# Altium PCB LNApcb.PcbDoc
Units mil, origin at the board's own origin, x right, y up, seen from the top; angles counter-clockwise.
Board outline 6000 x 4000 mil, 2 copper layers (Top Layer, Bottom Layer), stack 61.855 mil thick; 17 components, 7 nets, 42 pads, 4 vias.
Unrouted connection lines stored in the file: 16.
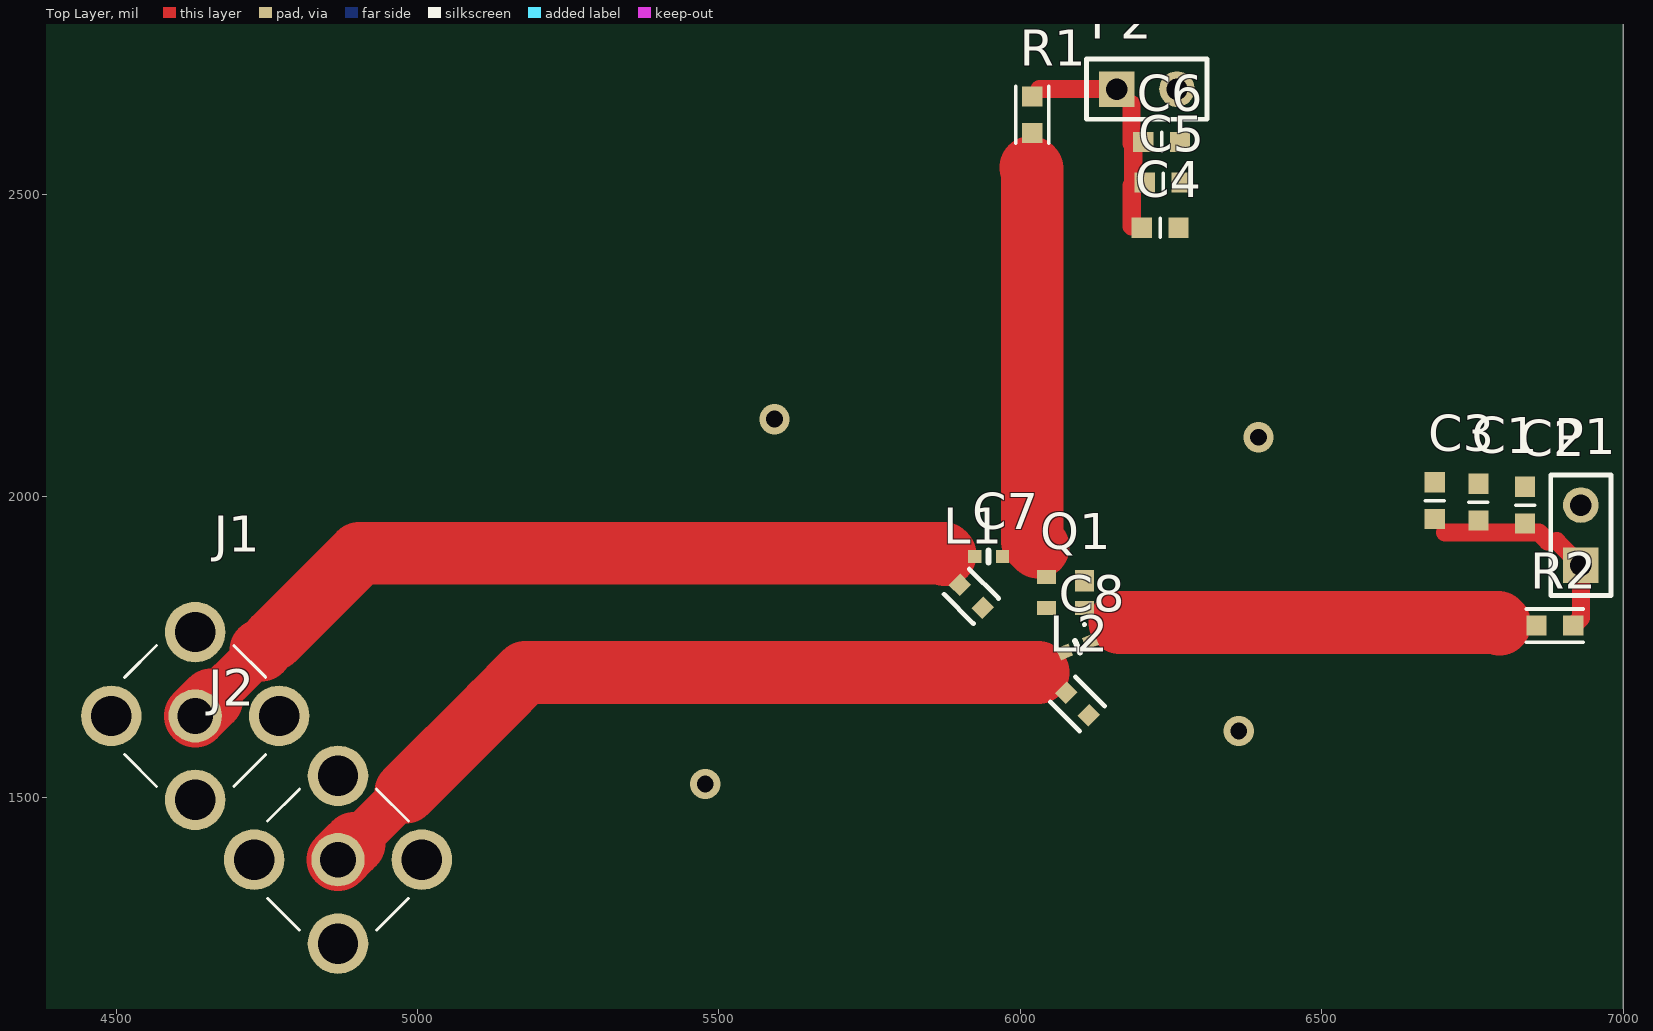
[diagram p0: Top Layer view]
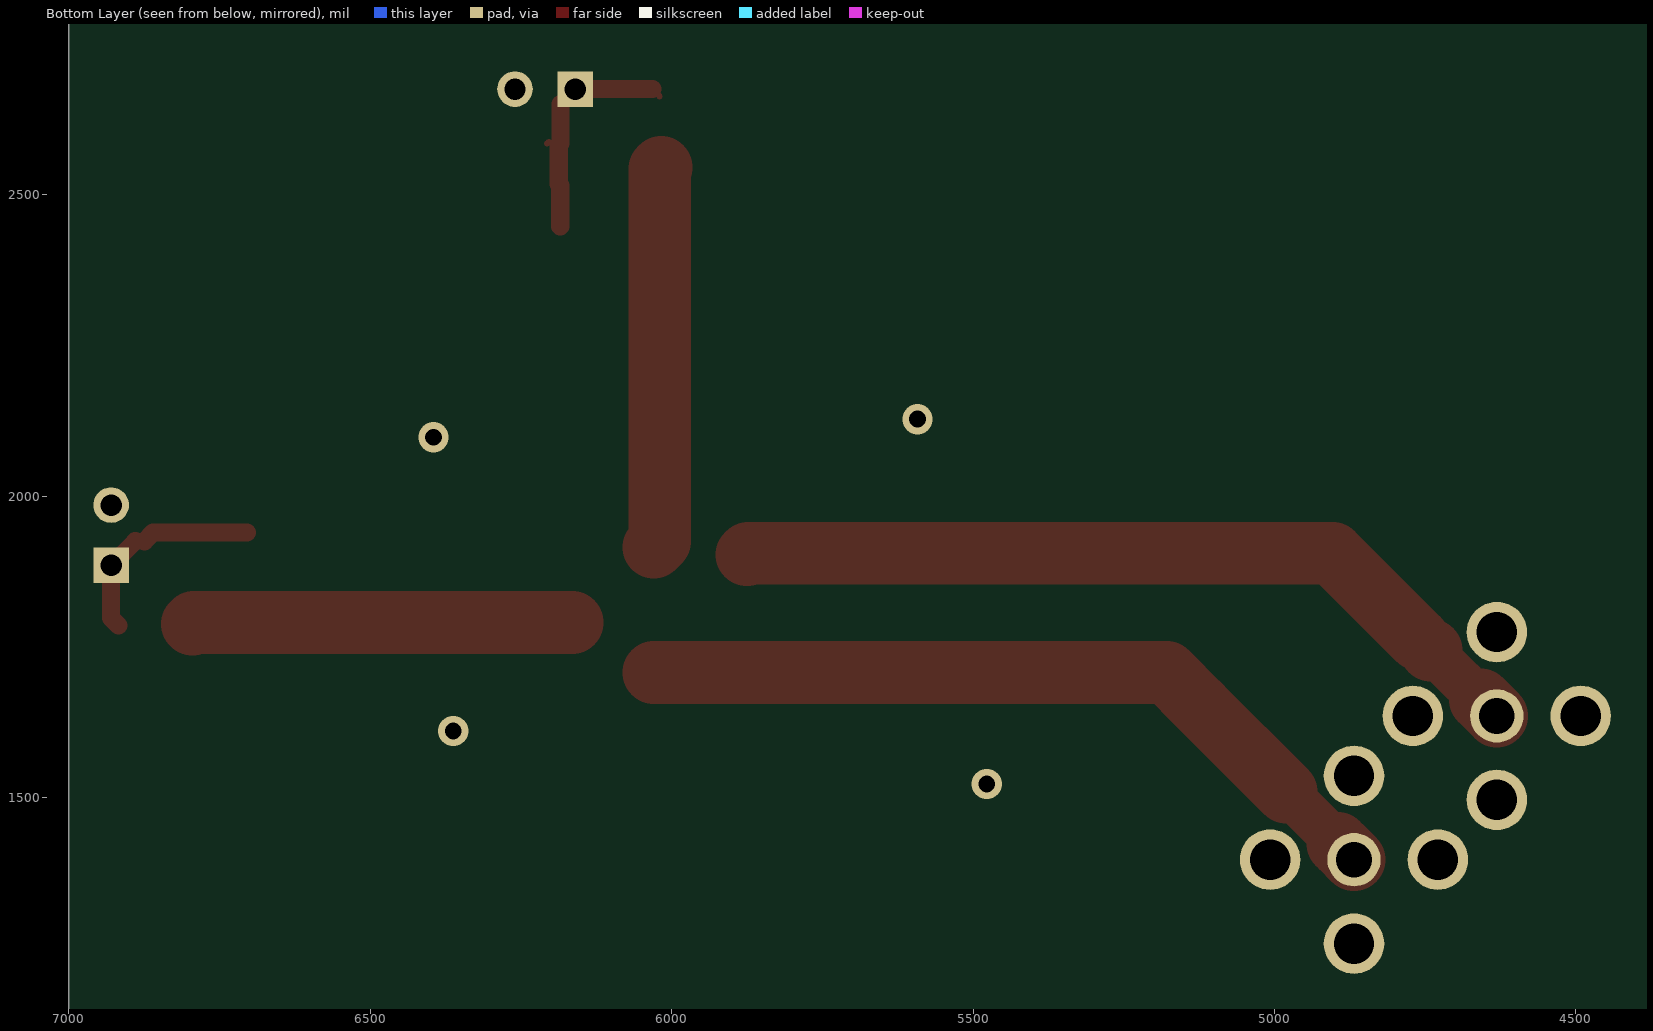
[diagram p1: Bottom Layer view, seen from below]
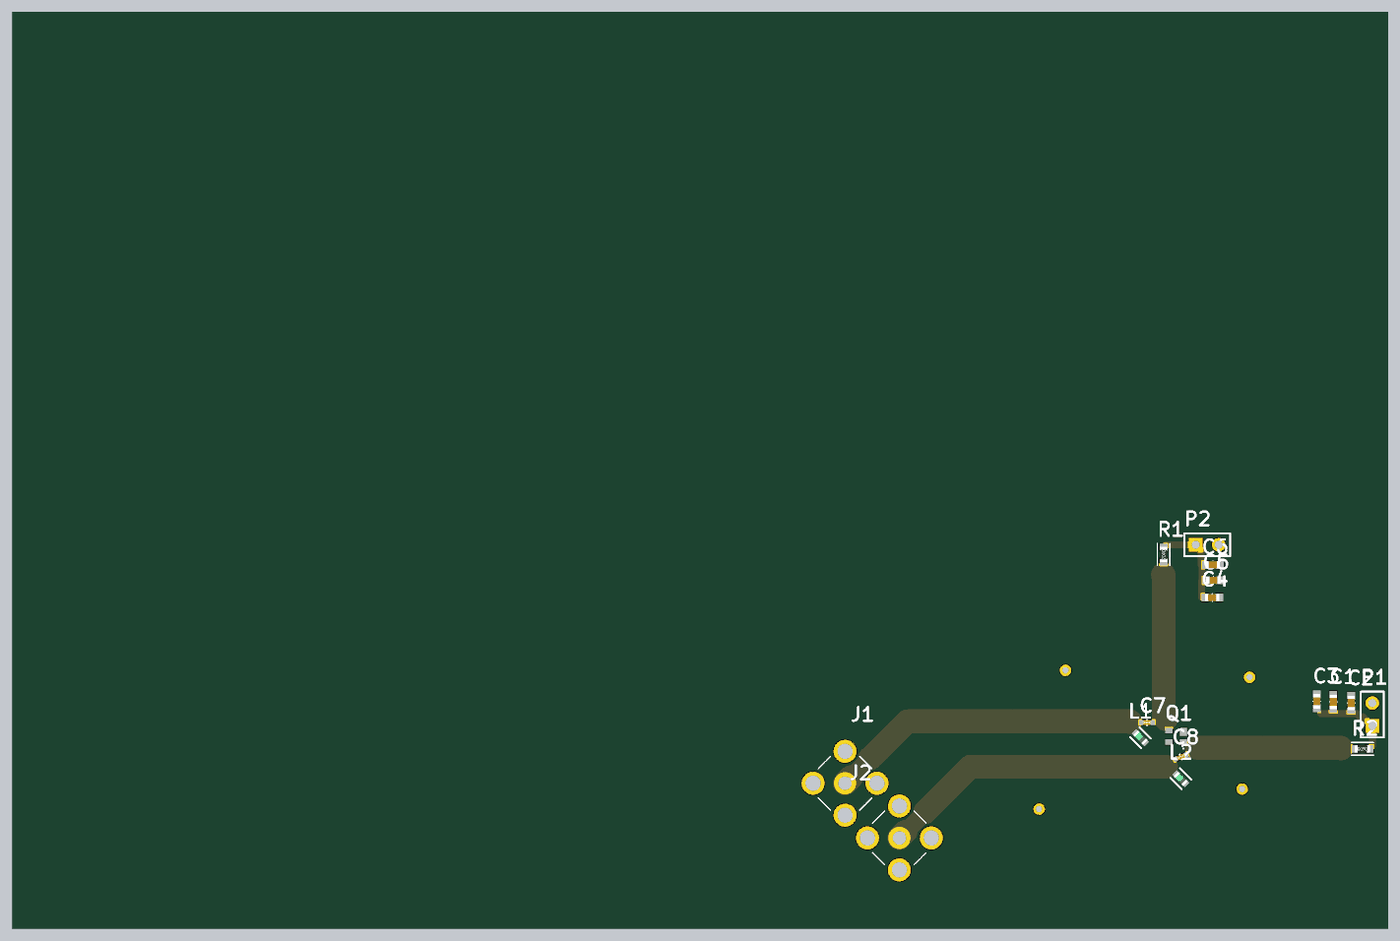
[diagram p2: 3D render of the assembled board from above, using the file's embedded part models]

## Layer stack, top to bottom
Top Layer: signal copper 1.4
Dielectric 1: dielectric 59.0551, FR-4, Dk 4.9
Bottom Layer: signal copper 1.4

## Board outline
1000,1000 7000,1000 7000,5000 1000,5000

## Design rules (kind name [scope] priority, off if disabled: settings)
Clearance [All] p1: gap=10 ignorepadtopadclearanceinfootprint=FALSE except(0: Arc-Hole Track-Hole SMDPad-Hole THPad-Hole Via-Hole Fill-Hole Poly-Hole Region-Hole Text-Hole)
HoleSize [All] p1: absolutevalues=TRUE maxlimit=118.11 minlimit=27.56 maxpercent=80.000 minpercent=20.000
Length "Schematic Length Constraint_3" [InNet('NetC7_2')] p1: maxlimit=1287.4 minlimit=1244.09
Length "Schematic Length Constraint_2" [InNet('NetC8_1')] p2: maxlimit=1287.4 minlimit=1244.09
Length "Schematic Length Constraint_1" [InNet('NetC7_1')] p3: maxlimit=645.67 minlimit=622.05
Length "Schematic Length Constraint" [InNet('NetC8_2')] p4: maxlimit=645.67 minlimit=622.05
MinimumSolderMaskSliver [All] p1: minsoldermaskwidth=4.92
PlaneConnect [All] p1: planeconnectstyle=Relief reliefexpansion=20 reliefentries=4 reliefconductorwidth=12 reliefairgap=10
PolygonConnect [All] p1: connectstyle=Relief reliefconductorwidth=19.68 reliefentries=4 polygonreliefangle="90 Angle" airgapwidth=7.87
RoutingVias [All] p1: holewidth=27.56 width=62.99 viastyle="Through Hole" minholewidth=27.56 minwidth=62.99 maxholewidth=27.56 maxwidth=62.99
SilkToSilkClearance [All] p1: silktosilkclearance=4.72
SilkToSolderMaskClearance [IsPad] p1: minsilkscreentomaskgap=3.94 clearancetoexposedcopper=TRUE
SolderMaskExpansion [All] p1: expansion=4 istentingtop=FALSE
Width RF-rule [InNetClass('RF')] p1: maxlimit=104.2 minlimit=104.2 preferedwidth=104.2 impedanceprofiledriven=TRUE impedanceprofileid={E7A6EAA5-AD94-4B6C-8492-8AB82108E587} impedanceprofilevalue=50.000000 minimp=50.000000 maximp=50.000000 favimp=50.000000 // impedanceForTheRF
Width Width_1 [All] p2: maxlimit=10 minlimit=10 preferedwidth=10
25 further rules are at their usual default settings.

## Classes and differential pairs
net class RF: NetC7_1 NetC7_2 NetC8_1 NetC8_2

## Components (designator, comment, footprint, x,y, rotation, side; value= is the part's Value field where it differs from the comment)
C1 "10µF" SMD-0603C 6760,1990 r0 top
C2 "0.10µF" SMD-0603C 6837.5,1985 r0 top
C3 "100pF" SMD-0603C 6687.5,1992.5 r0 top
C4 "0.10µF" SMD-0603C 6231.99,2445 r90 top
C5 "100pF" SMD-0603C 6236.99,2520 r90 top
C6 "10µF" SMD-0603C 6234.49,2587.5 r90 top
C7 "3pF" SMD-0402C 5947.5,1900 r270 top
C8 "10pF" SMD-0402C 6095,1750 r112.5 top
J1 "Output" LPRS_SMACONNECTOR 4631.29,1635.19 r315 top
J2 "Input" LPRS_SMACONNECTOR 4868.21,1396.75 r225 top
L1 "3.3nH" FP-LQG18HH_00-MFG 5918.79,1833.71 r135 top
L2 "1.8nH" FP-LQG18HH_00-MFG 6095,1655 r135 top
P1 "Header 2" HDR1X2 6930,1885 r90 top
P2 "Header 2" HDR1X2 6160,2675 r0 top
Q1 "BFP450" INF-SOT343_V 6075,1840 r180 top
R1 "40.2" SMD-0603-RES 6020,2632.5 r180 top
R2 "11k" SMD-0603-RES 6886.99,1785 r90 top

## Footprints (in the part's own frame and the unit in brackets; to place one, negate y for a bottom-side part, rotate by r counter-clockwise, add the part's x,y. Pads: shape width x height; smd on the part's side, far side on the other; paste and mask are expansions set on the pad)
FP-LQG18HH_00-MFG [mm]
  rect 0.65x0.7 smd paste+0 mask+0: 1(-0.675,0) 2(0.675,0)
  silkscreen extent -0.88,-0.75 0.88,0.75, body extent -1.1,-0.57 1.1,0.58, height 0.25
HDR1X2 [mm] "Connector; Header; 2 Position"
  rect 1.5x1.5 hole 0.9: 1(0,0)
  round 1.5 hole 0.9: 2(2.54,0)
  silkscreen extent -1.27,-1.27 3.81,1.27
INF-SOT343_V [mm] "SOT343, 4-Leads, Body 2x1.25 mm"
  rect 0.8x0.6 smd: 1(-0.8,0.65) 3(0.8,-0.65) 4(0.8,0.65)
  rect 0.8x0.9 smd: 2(-0.8,-0.5)
  silkscreen extent -0.85,1.3 -0.75,1.4, body extent -0.63,-1 0.63,1, height 1
LPRS_SMACONNECTOR [mm]
  round 2.25 hole 1.5: 1(0,0)
  round 2.55 hole 1.7: 2(2.5,2.5) 3(2.5,-2.5) 4(-2.5,-2.5) 5(-2.5,2.5)
  silkscreen extent -3.25,-3.25 3.25,3.25
SMD-0402C [mm]
  rect 0.55x0.55 smd: 1(0,0.584) 2(0,-0.584)
  silkscreen extent -0.25,0 0.25,0, body extent -0.25,-0.51 0.25,0.51, height 0.51
SMD-0603-RES [mm]
  rect 0.85x0.85 smd: 1(0,0.775) 2(0,-0.775)
  silkscreen extent -0.7,-1.2 0.7,1.2, body extent -0.4,-0.85 0.4,0.85, height 0.56
SMD-0603C [mm]
  rect 0.85x0.85 smd: 1(0,0.775) 2(0,-0.775)
  silkscreen extent -0.4,0 0.4,0, body extent -0.4,-0.8 0.4,0.8, height 0.9

## Part data
C1 C6: library part GRM185R60J106ME15D, "CAP CER 10UF 6.3V X5R 0603", Digi-Key Part Number=490-10467-1-ND, Manufacturer="Murata Electronics North America", Operating Temperature="-55°C ~ 85°C", Package / Case="0603 (1608 Metric)", Ratings=-, Temperature Coefficient=X5R, Tolerance=±20%, Voltage=6.3V, @ qty=0, Applications="General Purpose", Datasheets=http://www.murata.com/~/media/webrenewal/support/library/catalog/products/capacitor/mlcc/c02e.pdf, Factory Stock=0, Features="Derating Recommended", Height - Seated (Max)=-, Image=//media.digikey.com/Renders/Murata%20Renders/ZRB-SERIES-0402.jpg, Lead Spacing=-, Lead Style=-, Minimum Quantity=1, Mounting Type="Surface Mount, MLCC", Packaging="Cut Tape (CT)", Part Number=GRM185R60J106ME15D, Part Status=Active, Quantity Available=25068, Series=GRM, Size / Dimension="0.063\" L x 0.031\" W (1.60mm x 0.80mm)", Thickness (Max)="0.022\" (0.55mm)", Unit Price (USD)=0.36
C2 C4: library part GCJ188R71C104KA01D, "CAP CER 0.1UF 16V X7R 0603", Digi-Key Part Number=490-5796-1-ND, Manufacturer="Murata Electronics North America", Operating Temperature="-55°C ~ 125°C", Package / Case="0603 (1608 Metric)", Ratings=AEC-Q200, Temperature Coefficient=X7R, Tolerance=±10%, Voltage=16V, @ qty=0, Applications="Automotive, Boardflex Sensitive", Datasheets=http://www.murata.com/~/media/webrenewal/support/library/catalog/products/capacitor/mlcc/c03e.ashx, Factory Stock=0, Features="Soft Termination", Height - Seated (Max)=-, Image=//media.digikey.com/Renders/Murata%20Renders/0603%28LQG18%29.jpg, Lead Spacing=-, Lead Style=-, Minimum Quantity=1, Mounting Type="Surface Mount, MLCC", Packaging="Cut Tape (CT)", Part Number=GCJ188R71C104KA01D, Part Status=Active, Quantity Available=22473, Series=GCJ, Size / Dimension="0.063\" L x 0.031\" W (1.60mm x 0.80mm)", Thickness (Max)="0.035\" (0.90mm)", Unit Price (USD)=0.21
C3 C5: library part GCM1885C1H101JA16D, "CAP CER 100PF 50V NP0 0603", Digi-Key Part Number=490-4767-1-ND, Manufacturer="Murata Electronics North America", Operating Temperature="-55°C ~ 125°C", Package / Case="0603 (1608 Metric)", Ratings=AEC-Q200, Temperature Coefficient="C0G, NP0", Tolerance=±5%, Voltage=50V, @ qty=0, Applications=Automotive, Datasheets=http://www.murata.com/~/media/webrenewal/support/library/catalog/products/capacitor/mlcc/c03e.ashx, Factory Stock=0, Features=-, Height - Seated (Max)=-, Image=//media.digikey.com/Renders/Murata%20Renders/0603%28GCM188%29.jpg, Lead Spacing=-, Lead Style=-, Minimum Quantity=1, Mounting Type="Surface Mount, MLCC", Packaging="Cut Tape (CT)", Part Number=GCM1885C1H101JA16D, Part Status=Active, Quantity Available=85695, Series=GCM, Size / Dimension="0.063\" L x 0.031\" W (1.60mm x 0.80mm)", Thickness (Max)="0.035\" (0.90mm)", Unit Price (USD)=0.1
C7: library part GCM1555C1H3R0CA16D, "CAP CER 3PF 50V NP0 0402", Digi-Key Part Number=490-13290-1-ND, Manufacturer="Murata Electronics North America", Operating Temperature="-55°C ~ 125°C", Package / Case="0402 (1005 Metric)", Ratings=AEC-Q200, Temperature Coefficient="C0G, NP0", Tolerance=±0.25pF, Voltage=50V, @ qty=0, Applications=Automotive, Datasheets=http://www.murata.com/~/media/webrenewal/support/library/catalog/products/capacitor/mlcc/c03e.ashx, Factory Stock=0, Features=-, Height - Seated (Max)=-, Image=//media.digikey.com/Renders/Murata%20Renders/ZRB-SERIES-0402.jpg, Lead Spacing=-, Lead Style=-, Minimum Quantity=1, Mounting Type="Surface Mount, MLCC", Packaging="Cut Tape (CT)", Part Number=GCM1555C1H3R0CA16D, Part Status=Active, Quantity Available=4400, Series=GCM, Size / Dimension="0.039\" L x 0.020\" W (1.00mm x 0.50mm)", Thickness (Max)="0.022\" (0.55mm)", Unit Price (USD)=0.1
C8: library part GCM1555C1H100JA16D, "CAP CER 10PF 50V NP0 0402", Digi-Key Part Number=490-10668-1-ND, Manufacturer="Murata Electronics North America", Operating Temperature="-55°C ~ 125°C", Package / Case="0402 (1005 Metric)", Ratings=AEC-Q200, Temperature Coefficient="C0G, NP0", Tolerance=±5%, Voltage=50V, @ qty=0, Applications=Automotive, Datasheets=http://www.murata.com/~/media/webrenewal/support/library/catalog/products/capacitor/mlcc/c03e.ashx, Factory Stock=0, Features=-, Height - Seated (Max)=-, Image=//media.digikey.com/Renders/Murata%20Renders/ZRB-SERIES-0402.jpg, Lead Spacing=-, Lead Style=-, Minimum Quantity=1, Mounting Type="Surface Mount, MLCC", Packaging="Cut Tape (CT)", Part Number=GCM1555C1H100JA16D, Part Status=Active, Quantity Available=966, Series=GCM, Size / Dimension="0.039\" L x 0.020\" W (1.00mm x 0.50mm)", Thickness (Max)="0.022\" (0.55mm)", Unit Price (USD)=0.1
J1 J2: library part SMACONNECTOR, "SMA female RF coaxial connector for SMA male RF antennas.", Package=None, Availability=Unavailable, MP=SMACONNECTOR, Price=None
L1: library part CMP-06042-009861-1, "Multilayer type RF Inductor 3.3nH ±0.3nH 0.12Ω 1000mA 0603", Case Code (Imperial)=0603, Case Code (Metric)=1608, Current Rating=500mA, DC Resistance (DCR)=150mR, Max Operating Temperature=85°C, Min Operating Temperature=-55°C, Package Quantity=4000, Self Resonant Frequency=6GHz, Test Frequency=100MHz, Case/Package=0603, Core Material=Air, DC Current=500mA, Depth=0.95mm, Height=0.8mm, Height - Seated (Max)=0.037inch, Inductance=3.3nH, Lead Free="Lead Free", Length=1.6mm, Max DC Current=500mA, Military Standard=Not, Mount="Surface Mount", Packaging="Tape and Reel", Q Factor=12, Radiation Hardening=No, REACH SVHC="No SVHC", Shielding=Unshielded, Termination=SMD/SMT, Width=0.8mm
L2: library part CMP-06042-016493-1, "Multilayer type RF Inductor 1.8nH ±0.3nH 0.1Ω 1100mA 0603", Case Code (Imperial)=0603, Case Code (Metric)=1608, Current Rating=500mA, DC Resistance (DCR)=100mR, Max Operating Temperature=85°C, Min Operating Temperature=-55°C, Package Quantity=4000, Self Resonant Frequency=6GHz, Test Frequency=100MHz, Case/Package=0603, Core Material=Air, DC Current=500mA, Depth=0.95mm, Height=0.8mm, Height - Seated (Max)=0.037inch, Inductance=1.8nH, Lead Free="Lead Free", Length=1.6mm, Max DC Current=500mA, Military Standard=Not, Mount="Surface Mount", Number of Pins=2, Packaging="Tape and Reel", Q Factor=12, Radiation Hardening=No, Rated Current-Max=500mA, REACH SVHC="No SVHC", RoHS Compliant=Yes, Series=LQG18H, Shielding=Unshielded, Termination=SMD/SMT, Width=0.8mm
P1 P2: "Header, 2-Pin", LatestRevisionDate=17-Jul-2002, LatestRevisionNote="Re-released for DXP Platform.", Publisher="Altium Limited"
Q1: library part CMP-1189-00011-1, "High Linearity Low Noise Si NPN RF Transistor, 4.5 V VCEO, 100 mA IC, 15.5 dB Gmax, SOT343, Green", Manufacturer=Infineon, ComponentLink1Description="Manufacturer URL", ComponentLink1URL=http://www.infineon.com/, ComponentLink2Description=Datasheet, ComponentLink2URL=http://www.infineon.com/dgdl/bfp450.pdf?folderId=db3a30431400ef68011425b291f205c5&fileId=db3a30431400ef680114275d537d074b&location=en.Products.RF.RF_Transistors_.High_Linearity_Si-_and_SiGe_C-Transistors_for_use_up_to_6_GHz.DATASHEET.bfp450.pdf, ComponentLink3Description="Package Specification", ComponentLink3URL=http://www.infineon.com/dgdl/SOT343-Package_Overview.pdf?folderId=db3a30431936bc4b0119535155343cba&fileId=db3a30431936bc4b0119535a9f393cd3, DatasheetVersion="Rev. 1.0", Gmax (typ)="15.5 dB", Green=yes, Group="Si transistors with high gain up to 2.5 GHz", Halogen-free=yes, IC (max)="100 mA", Mounting Technology="Surface Mount", NFmin (typ)="1.25 dB", PackageDescription="4-Pin Small Outline Transistor Package, 1.25 x 2 mm Body", PackageReference=SOT343, PartNumber=BFP450, Ptot (max)="450.0 mW", VCEO (max)="4.5 V"
R1: library part ERJ-3EKF40R2V, "RES SMD 40.2 OHM 1% 1/10W 0603", Digi-Key Part Number=P40.2HCT-ND, Manufacturer="Panasonic Electronic Components", Operating Temperature="-55°C ~ 155°C", Package / Case="0603 (1608 Metric)", Power (Watts)="0.1W, 1/10W", Supplier Device Package=0603, Temperature Coefficient=±100ppm/°C, Tolerance=±1%, @ qty=1500, Composition="Thick Film", Datasheets=http://industrial.panasonic.com/www-cgi/jvcr13pz.cgi?E+PZ+3+AOA0002+ERJ3EKF40R2V+7+WW, Factory Stock=0, Failure Rate=-, Features="Automotive AEC-Q200", Height - Seated (Max)="0.022\" (0.55mm)", Image=//media.digikey.com/Photos/Panasonic%20Photos/MFG_ERJ-P6W%20Series.jpg, Minimum Quantity=1, Number of Terminations=2, Packaging="Cut Tape (CT)", Part Number=ERJ-3EKF40R2V, Part Status=Active, Quantity Available=765308, Series=ERJ, Size / Dimension="0.063\" L x 0.031\" W (1.60mm x 0.80mm)", Unit Price (USD)=0.00379
R2: library part ERJ-3EKF1102V, "RES SMD 11K OHM 1% 1/10W 0603", Digi-Key Part Number=P11.0KHCT-ND, Manufacturer="Panasonic Electronic Components", Operating Temperature="-55°C ~ 155°C", Package / Case="0603 (1608 Metric)", Power (Watts)="0.1W, 1/10W", Supplier Device Package=0603, Temperature Coefficient=±100ppm/°C, Tolerance=±1%, @ qty=1500, Composition="Thick Film", Datasheets=http://industrial.panasonic.com/www-cgi/jvcr13pz.cgi?E+PZ+3+AOA0002+ERJ3EKF1102V+7+WW, Factory Stock=0, Failure Rate=-, Features="Automotive AEC-Q200", Height - Seated (Max)="0.022\" (0.55mm)", Image=//media.digikey.com/Photos/Panasonic%20Photos/MFG_ERJ-P6W%20Series.jpg, Minimum Quantity=1, Number of Terminations=2, Packaging="Cut Tape (CT)", Part Number=ERJ-3EKF1102V, Part Status=Active, Quantity Available=6648, Series=ERJ, Size / Dimension="0.063\" L x 0.031\" W (1.60mm x 0.80mm)", Unit Price (USD)=0.00379

## Via types
v1: diameter 50, hole 28, Top Layer to Bottom Layer, 4 vias

## Nets (pads, with @x,y where several pads share a name; then routed paths per layer and width w, separated by ;. In a path a pad name is that pad's centre, name@x,y a point inside that pad or via, vN(x,y) a via of type N, cw(c..) or ccw(c..) an arc to the next point about the centre after c; other vN are vias at no path point)
GND: C1.1 C2.1 C3.1 C4.2 C5.2 C6.2 J1.2 J1.3 J1.4 J1.5 J2.2 J2.3 J2.4 J2.5 L1.1 L2.1 P1.2 P2.2 Q1.2 Q1.4
  other v1: 5477.5,1522.5 6362.5,1610 6395,2097.5 5592.5,2127.5
NetC1_2: C1.2 C2.2 C3.2 P1.1 R2.2 | length 352.7
  Top Layer w10: 6875,1925 6890,1925
  Top Layer w30: 6705,1939.49 6770,1939.49 6837.5,1939.49 6840,1939.49 6860.51,1939.49 6875,1925 ; 6890,1925 P1.1 6930,1797.5 R2.2
NetC4_1: C4.1 C5.1 C6.1 P2.1 R1.2 | length 384.9
  Top Layer w10: R1.2 R1.2@6031.99,2675 ; P2.1 P2.1@6184.49,2650.51 ; C6.1 C6.1@6206.99,2584.49
  Top Layer w30: R1.2@6031.99,2675 P2.1 ; 6184.49,2585 P2.1@6184.49,2650.51 ; C4.1@6185,2447.5 6185,2515 6187.5,2517.5 C6.1@6187.5,2581.99
NetC7_1: C7.1 Q1.3 R1.1 | length 635.2
  Top Layer w104.2: 6017.5,2545 6020,2542.5 6020,1925 6030,1915
NetC7_2: C7.2 J1.1 L1.2 | length 1251.3
  Top Layer w74.8: 4687.86,1691.76 4716.14,1720.04
  Top Layer w104.2: J1.1 J1.1@4658.18,1662.09 ; 4761.76,1762.63 4904.13,1905 5872.5,1905 5875,1902.5
NetC8_1: C8.1 J2.1 L2.2 | length 1271.7
  Top Layer w74.8: J2.1@4895.11,1423.65 4967.21,1495.75
  Top Layer w75.98: J2.1@4889.42,1417.96 J2.1@4895.11,1423.65
  Top Layer w104.2: J2.1 J2.1@4889.42,1417.96 ; 4980.51,1509.05 5123.88,1652.42 5178.96,1707.5 6030,1707.5
NetC8_2: C8.2 Q1.1 R2.1 | length 631
  Top Layer w104.2: 6165,1790 6792.5,1790 6795,1787.5